# Altium PCB buzzer.PcbDoc
Units mil, origin at the board's own origin, x right, y up, seen from the top; angles counter-clockwise.
Board outline 6000 x 4000 mil, 2 copper layers (Top Layer, Bottom Layer); 10 components, 6 nets, 21 pads, 2 vias.
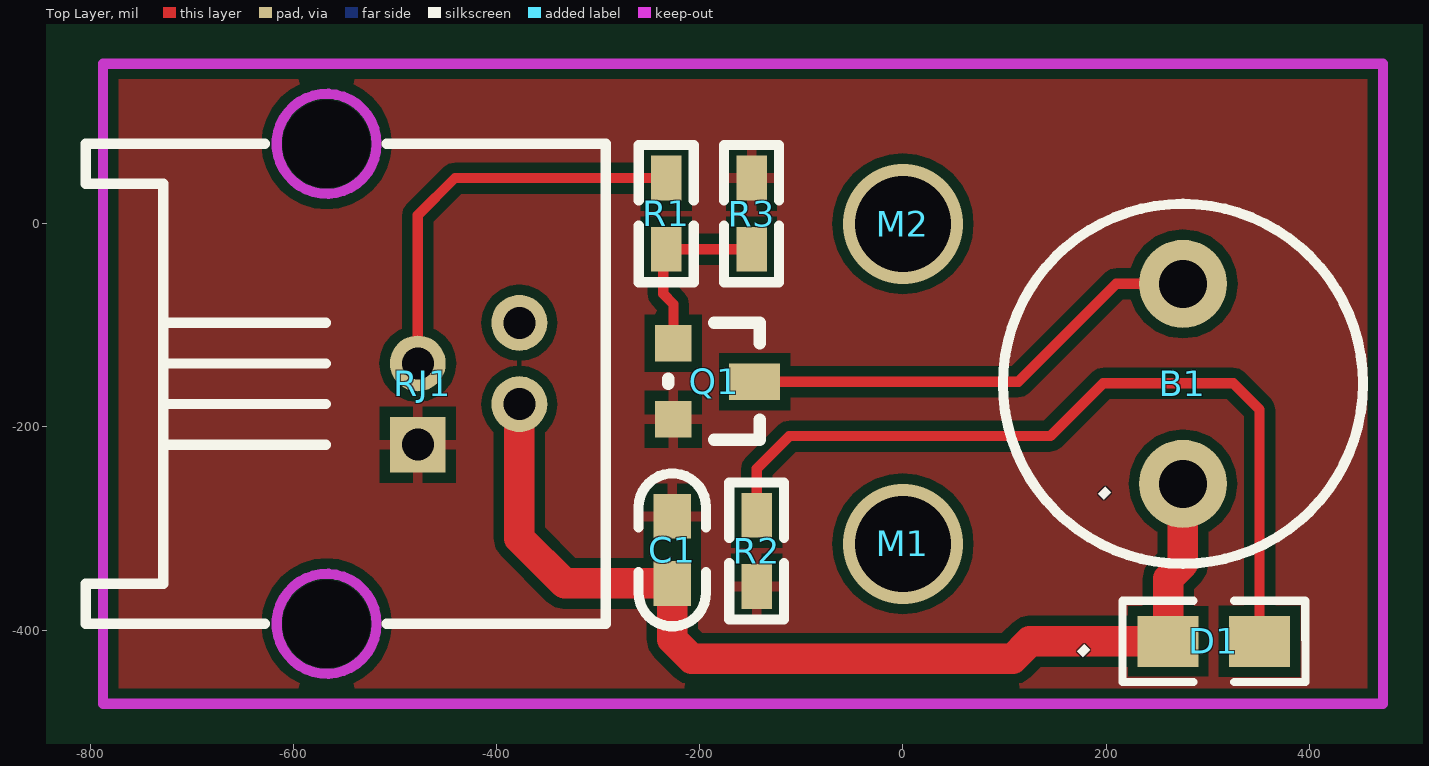
[diagram p0: Top Layer view]
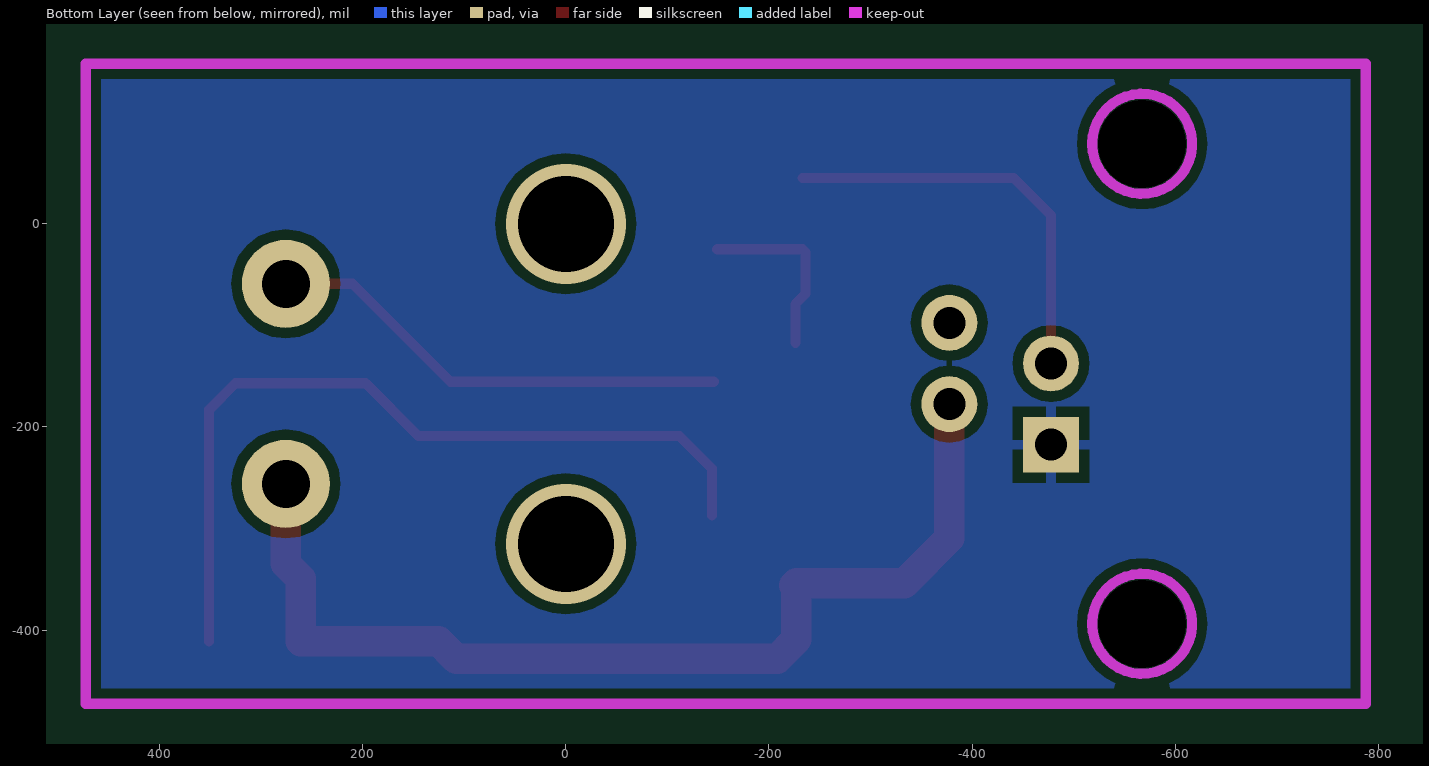
[diagram p1: Bottom Layer view, seen from below]

## Layer stack, top to bottom
Top Solder: solder mask 0.4, Solder Resist, Dk 3.5
Top Layer: signal copper 1.4
Dielectric 1: dielectric 12.6, FR-4, Dk 4.8
Bottom Layer: signal copper 1.4
Bottom Solder: solder mask 0.4, Solder Resist, Dk 3.5

## Board outline
-3770,-2470 2230,-2470 2230,1530 -3770,1530

## Design rules (kind name [scope] priority, off if disabled: settings)
Clearance [All] p1: gap=10
ComponentClearance [All] p1 off: gap=10 collisioncheckmode=3 verticalgap=10 showdistances=FALSE
PolygonConnect [All] p1: connectstyle=Relief reliefconductorwidth=10 reliefentries=4 polygonreliefangle="90 Angle" airgapwidth=10
RoutingVias [All] p1: holewidth=28 width=50 viastyle="Through Hole" minholewidth=28 minwidth=50 maxholewidth=28 maxwidth=50
SolderMaskExpansion [All] p1: expansion=4
Width [All] p1: maxlimit=218.11 minlimit=10 preferedwidth=10
28 further rules are at their usual default settings.

## Components (designator, comment, footprint, x,y, rotation, side; value= is the part's Value field where it differs from the comment)
B1 "buzzer" BUZZER 275.59,-157.48 r90 top
C1 "Cap" 0603_C -227,-321 r180 top
D1 "LED" 0805 306,-411 r270 top
M1 "M2" M2 0,-314.96 r0 top
M2 "M2" M2 0,0 r0 top
Q1 "S8050" SOT23 -186,-155 r270 top
R1 "Res2" 0603_R -233,10 r180 top
R2 "Res2" 0603_R -144,-322 r180 top
R3 "Res2" 0603_R -149,10 r180 top
RJ1 "RJ11" RJ11 -472.44,-157.48 r90 top

## Footprints (in the part's own frame and the unit in brackets; to place one, negate y for a bottom-side part, rotate by r counter-clockwise, add the part's x,y. Pads: shape width x height; smd on the part's side, far side on the other; paste and mask are expansions set on the pad)
0603_C [mil]
  rect 37x44 smd: 1(0,-33) 2(0,33)
  silkscreen extent -33,-75 33,75
0603_R [mil]
  rect 30x44 smd: 1(0,35) 2(0,-35)
  silkscreen extent -27,-68 27,68, body extent -19,-52 20,50, height 21
0805 [mil]
  rect 50x60 smd: 1(0,-45) 2(0,45)
  silkscreen extent -40,-90 40,90
BUZZER [mm]
  round 2.2 hole 1.2: 1(-2.5,0) 2(2.5,0)
  silkscreen extent -4.5,-4.5 4.5,4.5
M2 [mil]
RJ11 [mm]
  round 2.1 hole 2.2 unplated: 0(-6,2.41) 0(6,2.41)
  rect 1.397x1.397 hole 0.8: 1(-1.524,0.13)
  round 1.397 hole 0.8: 2(-0.508,-2.41) 3(0.508,0.13) 4(1.524,-2.41)
  Keep-Out Layer circle w0.254: c6,2.41 r1.25
  Keep-Out Layer circle w0.254: c-6,2.41 r1.25
  silkscreen extent -6,-4.57 6,8.43
SOT23 [mil]
  rect 36x36 smd: 1(37.5,-40) 2(-37.5,-40)
  rect 36x50 smd: 3(0.5,40)
  silkscreen extent -58,-45 58,45

## Part data
C1: "Capacitor"
D1: library part LED1, "Typical RED GaAs LED"
M1 M2: library part M3
Q1: library part 2N3904, "NPN General Purpose Amplifier"
R1 R2 R3: "Resistor"

## Via types
v1: diameter 118.11, hole 94.49, Top Layer to Bottom Layer, 2 vias

## Nets (pads, with @x,y where several pads share a name; then routed paths per layer and width w, separated by ;. In a path a pad name is that pad's centre, name@x,y a point inside that pad or via, vN(x,y) a via of type N, cw(c..) or ccw(c..) an arc to the next point about the centre after c; other vN are vias at no path point)
GND: C1.1 Q1.1 R2.1 R3.2 RJ1.1
NetB1_2: B1.2 Q1.3 | length 461.5
  Top Layer w10: Q1.3 113.5,-155.5 209.94,-59.06 B1.2
NetD1_2: D1.2 R2.2 | length 814.6
  Top Layer w10: R2.2 -144,-241 -112,-209 145,-209 197,-157 325,-157 351,-183 D1.2
NetQ1_2: Q1.2 R1.1 R3.1 | length 181.9
  Top Layer w10: Q1.2 -226,-79 -236,-69 -236,-28 R1.1 R3.1
NetR1_2: R1.2 RJ1.3 | length 405.6
  Top Layer w10: RJ1.3 -477.56,8.44 -441,45 R1.2
VCC: B1.1 C1.2 D1.1 RJ1.2 | length 1022.9
  Top Layer w30: RJ1.2 -377.56,-309.44 -333,-354 C1.2 ; C1.2@-225,-356 C1.2 ; B1.1 275.59,-334.65 261,-349.24 D1.1 125,-411 108,-428 -208,-428 -227,-409 C1.2
pads on no net: RJ1.0 RJ1.4
copper on no net:
  other v1: 0,-314.96 0,0

## Polygon pours and split planes (outlines as drawn)
GND on Top Layer "Top Layer-No Net" (solid, remove dead copper, pour order 4): -832,180 -829,177 525,177 525,-552 523,-554 486,-517 -835,-517
GND on Bottom Layer "Top Layer-No Net" (solid, remove dead copper, pour order 6): -807,178 494,178 501,171 510,162 510,-526 -825,-526 -834,-517

## Keep-outs
Keep-Out Layer:
  lines w10: -787.4,-472.44 472.44,-472.44 472.44,157.48 -787.4,157.48 -787.4,-472.44

## Silkscreen, mask and mechanical layers (free items; w line width, h text height)
Top Overlay:
  text "." at 186,-260 h60 r315
  text "." at 165,-415 h60 r315

## Text inside footprints (layer, text, board x,y; h text height)
RJ1: Mechanical 1 "4" at -748.11,-97.48 h39.37 r270; Mechanical 1 "1" at -748.11,-237.48 h39.37 r270; Mechanical 1 "4" at -348.11,-107.48 h39.37 r270; Mechanical 1 "3" at -568.11,-147.48 h39.37 r270; Mechanical 1 "2" at -348.11,-187.48 h39.37 r270; Mechanical 1 "1" at -568.11,-227.48 h39.37 r270